# Altium PCB L298_Board.PcbDoc
Units mm, origin at the board's own origin, x right, y up, seen from the top; angles counter-clockwise.
Board outline 35.56 x 35.56 mm, 2 copper layers (Top Layer, Bottom Layer); 20 components, 15 nets, 72 pads, 39 vias.
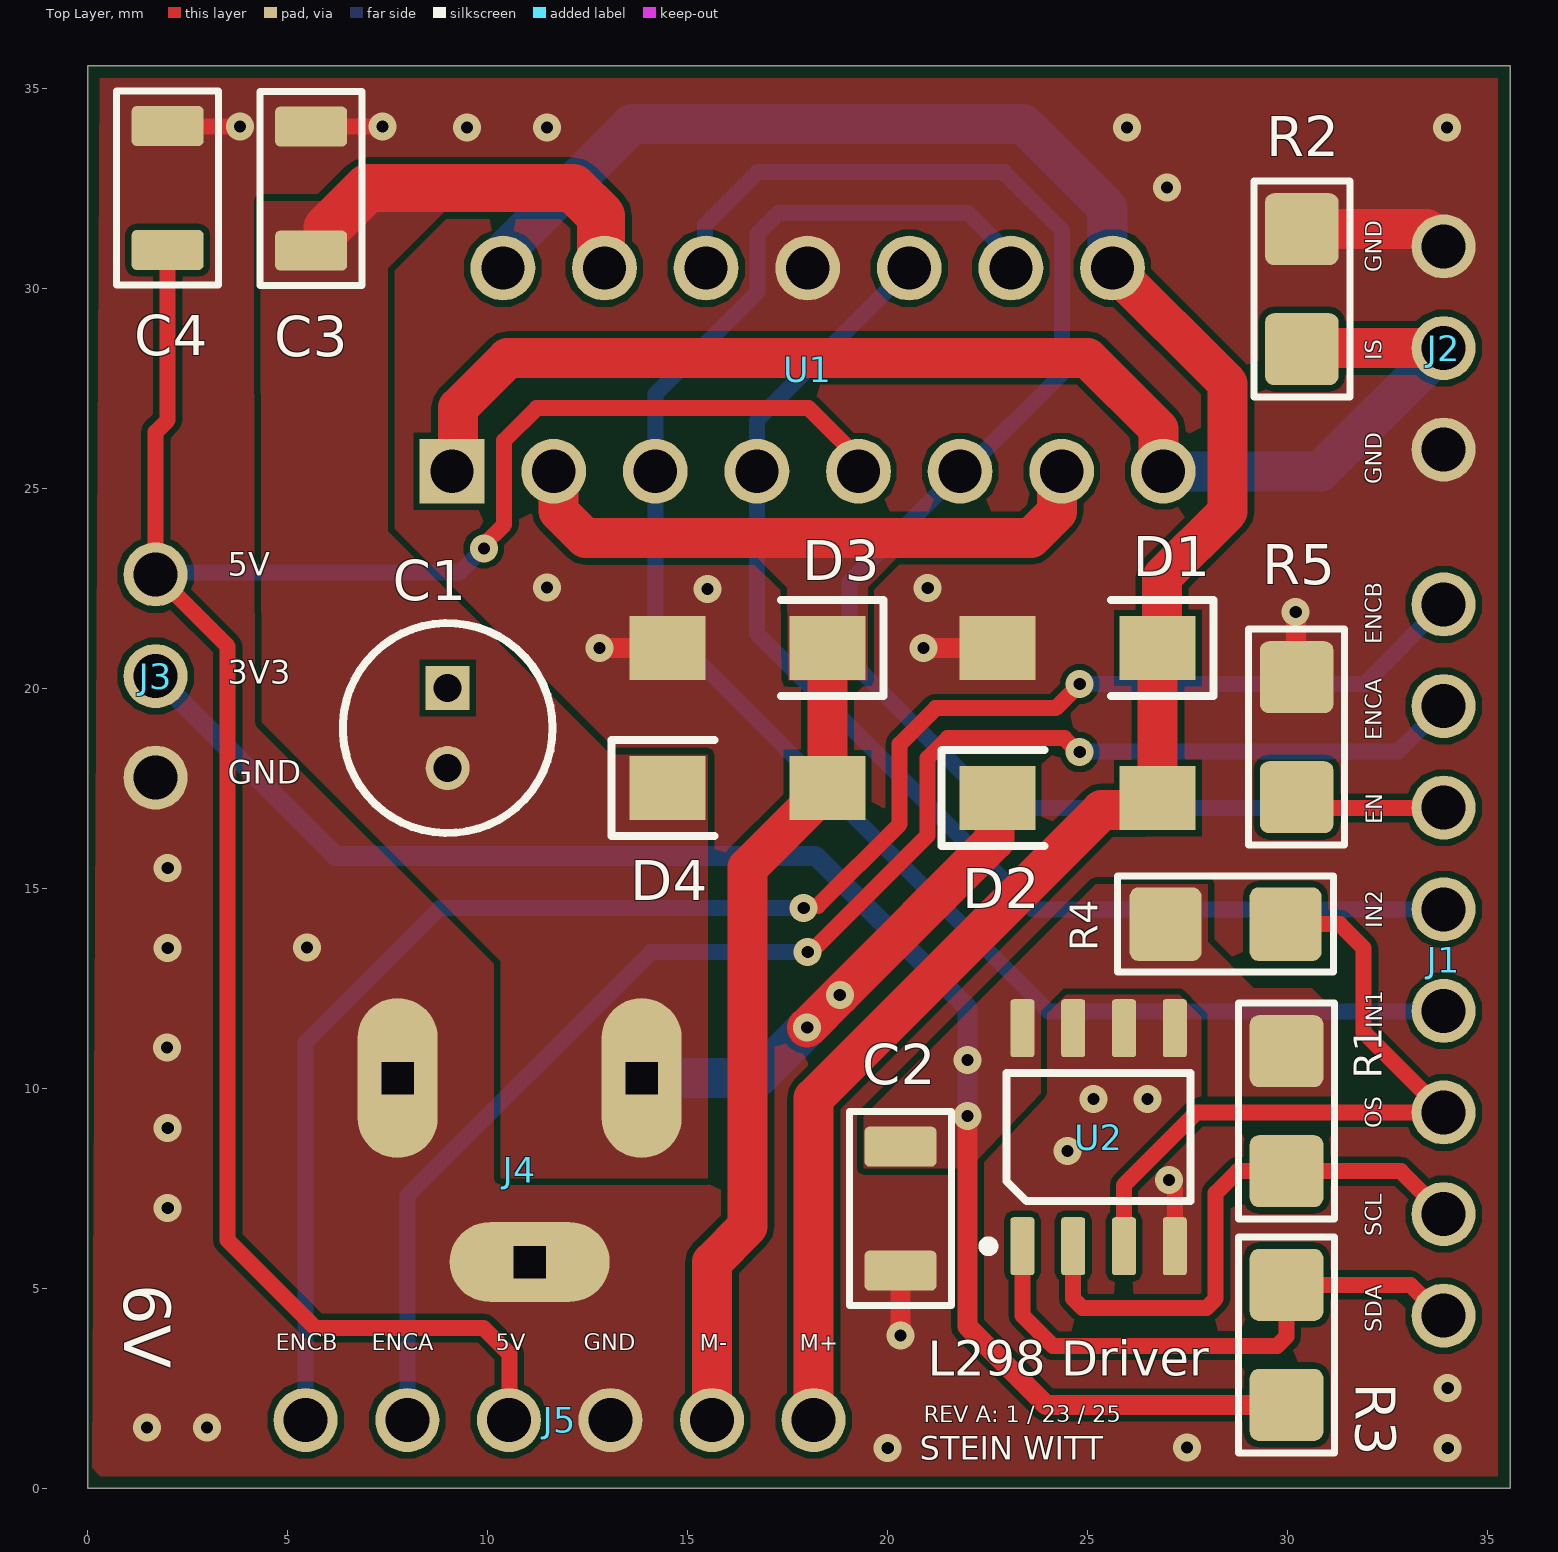
[diagram p0: Top Layer view]
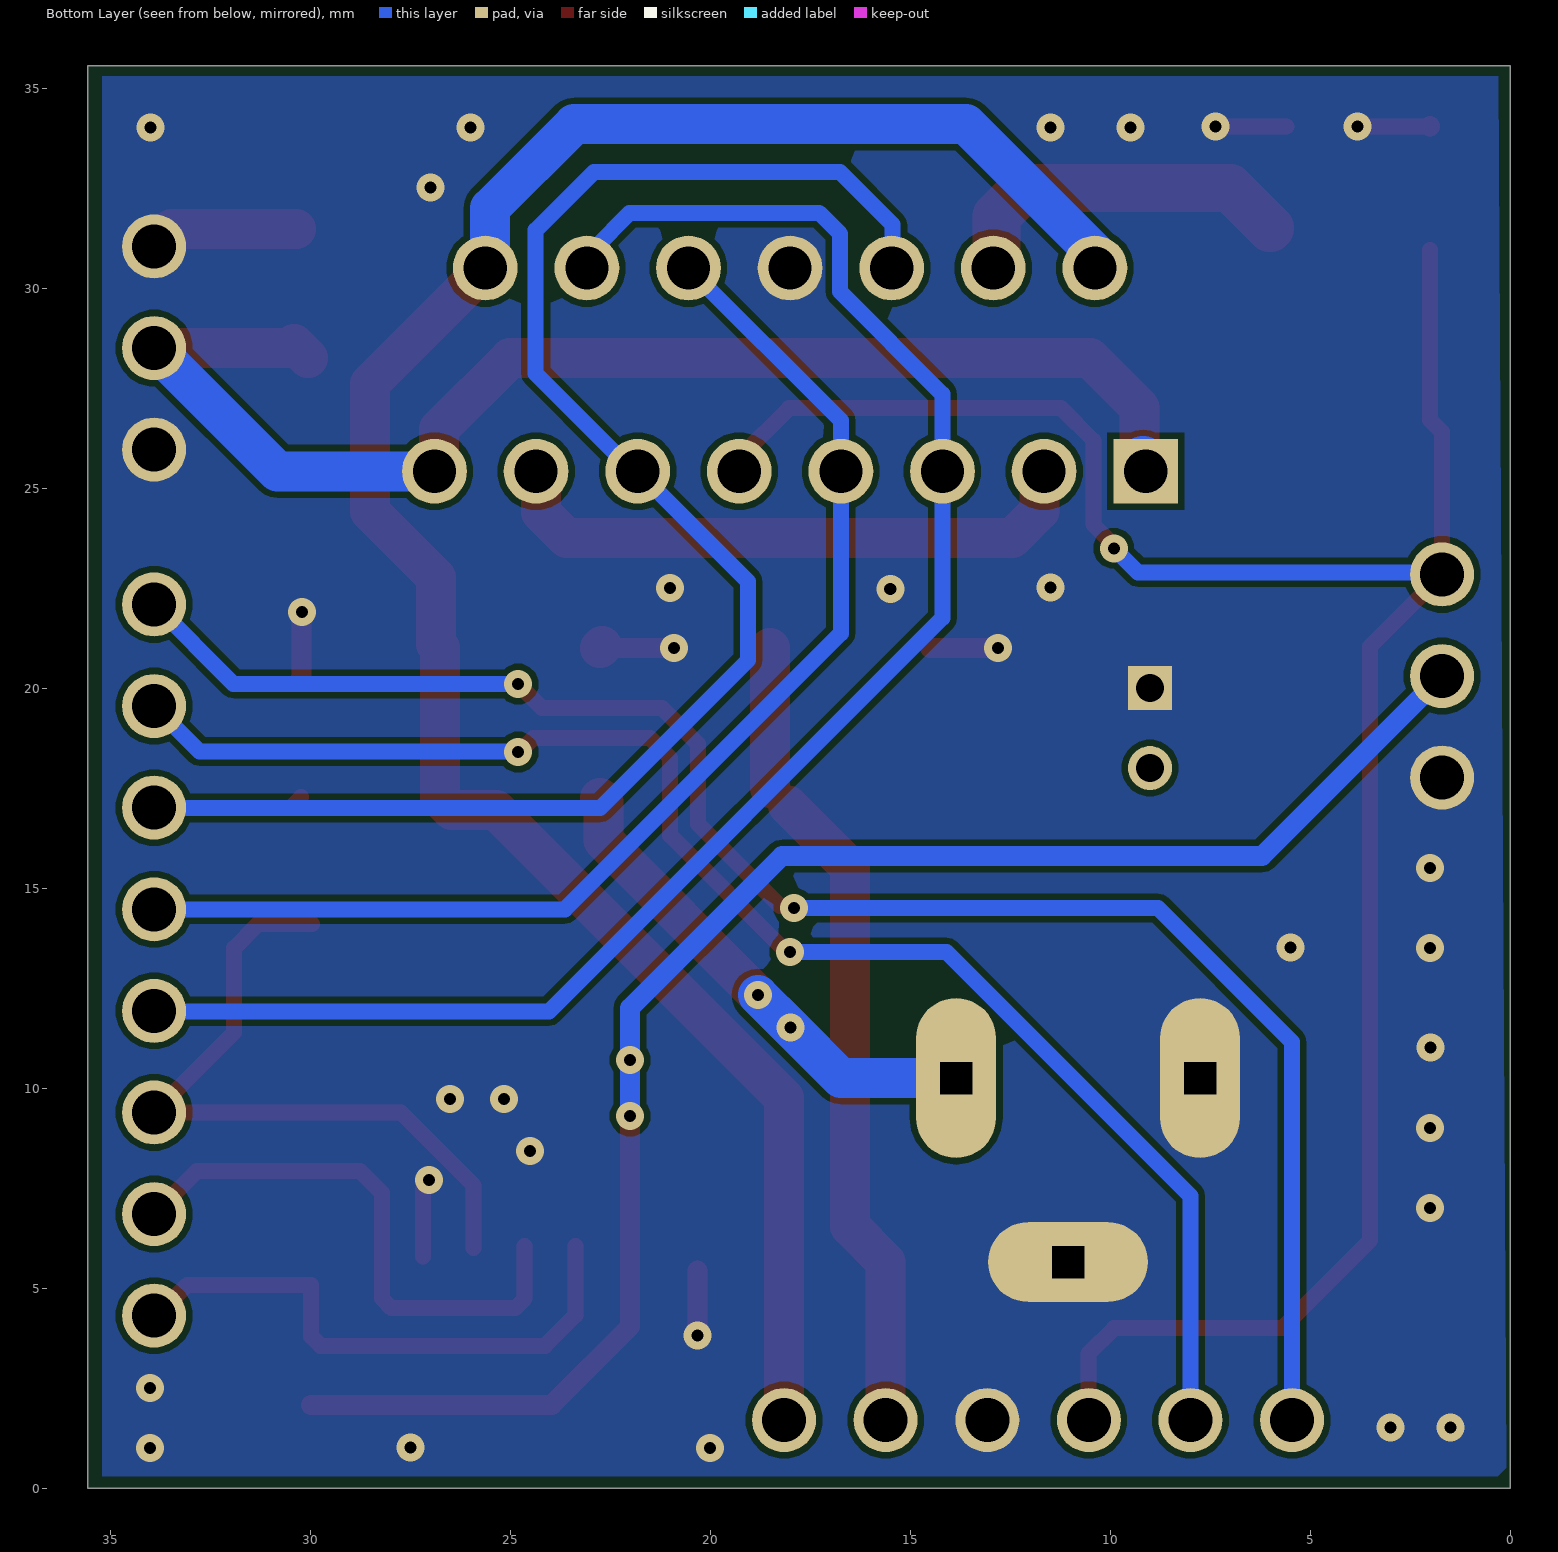
[diagram p1: Bottom Layer view, seen from below]
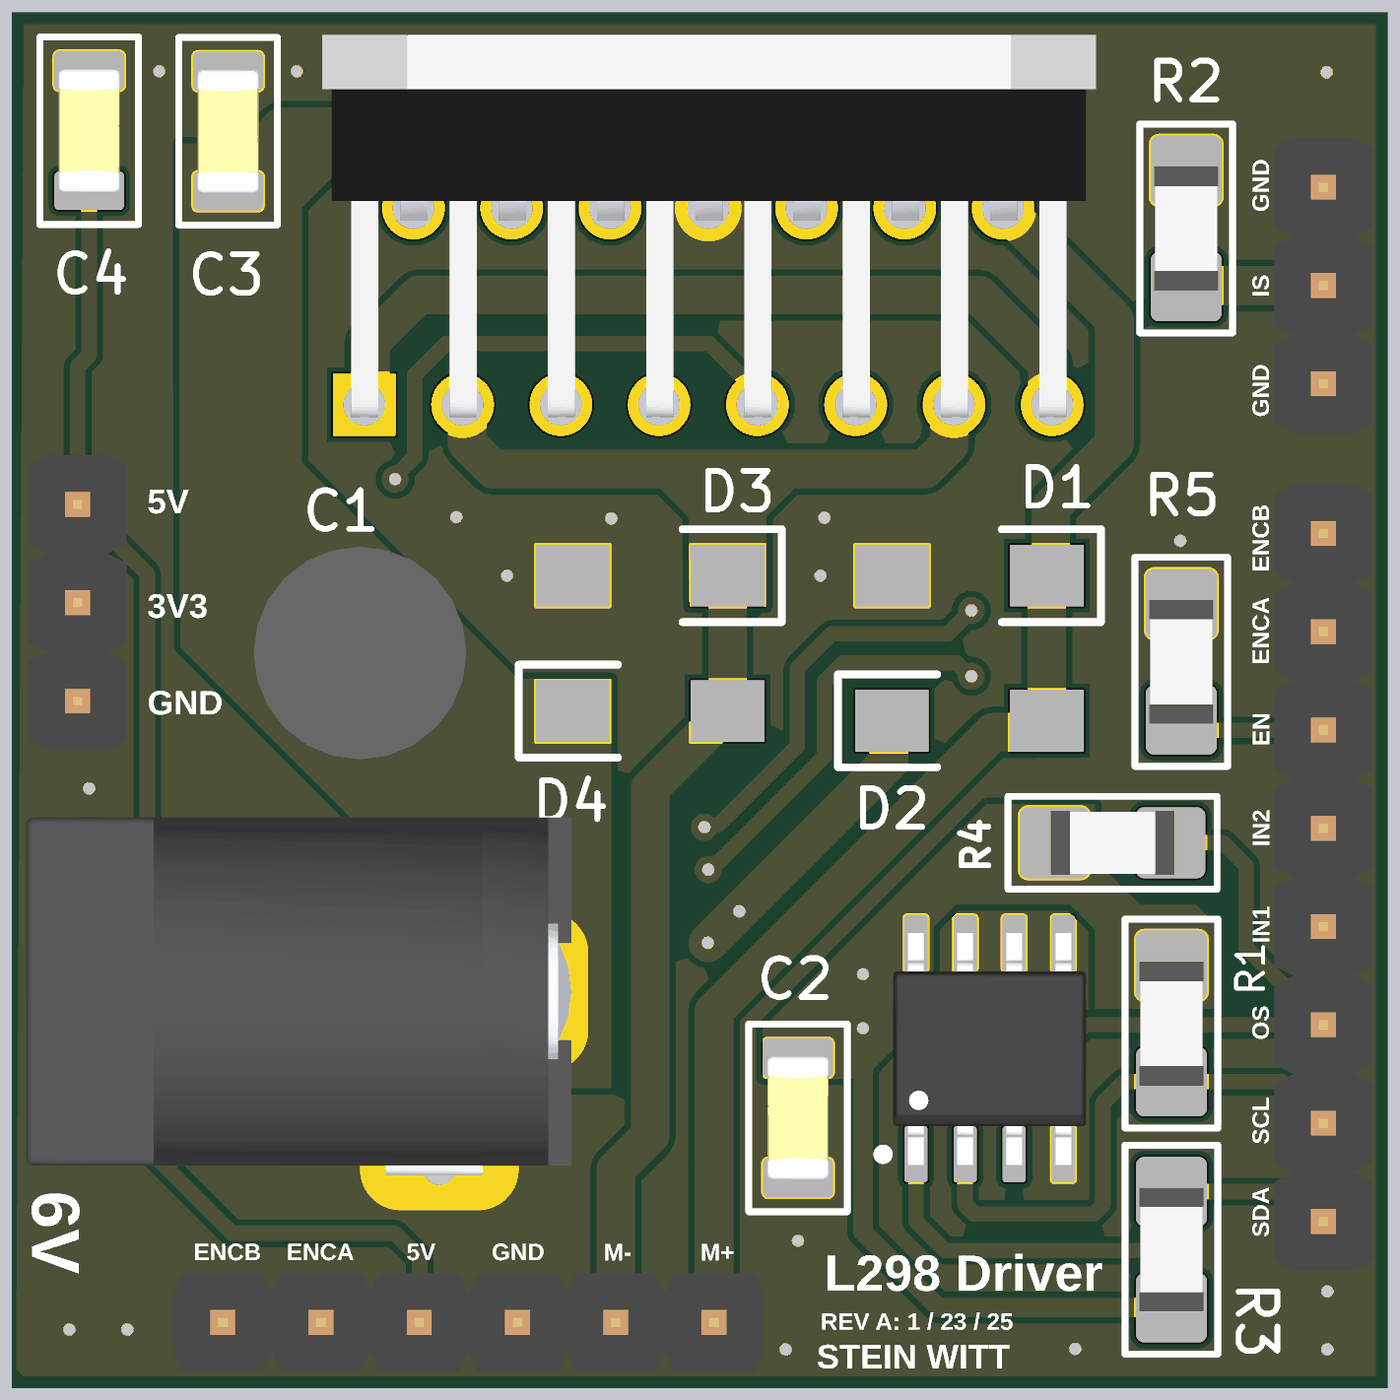
[diagram p2: 3D render of the assembled board from above, using the file's embedded part models]

## Layer stack, top to bottom
Top Solder: solder mask 0.0102, Solder Resist, Dk 3.5
Top Layer: signal copper 0.0356
Dielectric 1: dielectric 0.32, FR-4, Dk 4.8
Bottom Layer: signal copper 0.0356
Bottom Solder: solder mask 0.0102, Solder Resist, Dk 3.5

## Board outline
0,0 35.56,0 35.56,35.56 0,35.56

## Design rules (kind name [scope] priority, off if disabled: settings)
Clearance [All] p1: gap=0.152 ignorepadtopadclearanceinfootprint=FALSE
HoleSize [All] p1: absolutevalues=TRUE maxlimit=4 minlimit=0.025 maxpercent=80.000 minpercent=20.000
MinimumAnnularRing [All] p1: minimumring=0.127
PlaneClearance [All] p1: clearance=0.5
PolygonConnect [All] p1: connectstyle=Direct reliefconductorwidth=0.254 reliefentries=4 polygonreliefangle="90 Angle" airgapwidth=0.254
RoutingVias [All] p1: holewidth=0.305 width=0.61 viastyle="Through Hole" minholewidth=0.254 minwidth=0.508 maxholewidth=1.27 maxwidth=2.54
SilkToSolderMaskClearance [IsPad] p1: minsilkscreentomaskgap=0.041 clearancetoexposedcopper=TRUE
SolderMaskExpansion [All] p1: expansion=0.051 istentingtop=FALSE
SupplyNets "Schematic Supply Nets_3" [InNet('3V3')] p1: voltage=0.000
SupplyNets "Schematic Supply Nets_2" [InNet('GND')] p2: voltage=0.000
SupplyNets "Schematic Supply Nets_1" [InNet('5V')] p3: voltage=0.000
SupplyNets "Schematic Supply Nets" [InNet('6V')] p4: voltage=0.000
Width [All] p1: maxlimit=2 minlimit=0.152 preferedwidth=0.254 minimp=50.000000 maximp=50.000000 favimp=50.000000
27 further rules are at their usual default settings.

## Components (designator, comment, footprint, x,y, rotation, side; value= is the part's Value field where it differs from the comment)
C1 "REA010M2CBK-0511P" CAP_TH_RADIAL_0511 9,20 r270 top value=1uF
C2 "C1206C104K5RAC7800" CAP_1206 20.32,6.985 r90 top
C3 "C1206C104K5RAC7800" CAP_1206 5.588,32.486 r270 top
C4 "C1206C104K5RAC7800" CAP_1206 2,32.5 r90 top
D1 "RS2AA R3G" RS2AA 24.75,21 r180 top
D2 "RS2AA R3G" RS2AA 24.75,17.25 r0 top
D3 "RS2AA R3G" RS2AA 16.5,21 r180 top
D4 "RS2AA R3G" RS2AA 16.5,17.5 r0 top
J1 "8 Pin Male Connector" "8 PIN THT HEADER" 33.9,13.2 r270 top
J2 "3 Pin 2.54mm Male Connector" "3 PIN THT HEADER" 33.9,28.5 r270 top
J3 "3 Pin 2.54mm Male Connector" "3 PIN THT HEADER" 1.7,20.3 r90 top
J4 "Barrel Jack" GRAVITECH_CON-SOCJ-2155 7.75,10.25 r0 top
J5 "Motor_Header" "6 PIN THT HEADER" 11.8,1.7 r180 top
R1 "RC1206JR-0710KL" RES_1206 29.972,9.422 r270 top value=10k
R2 "RL1206FR-070R04L" RES_1206 30.353,29.972 r270 top value=40M
R3 "RC1206JR-0710KL" RES_1206 29.972,3.58 r90 top value=10k
R4 "RC1206JR-0710KL" RES_1206 28.448,14.097 r180 top value=10k
R5 "RC1206JR-0710KL" RES_1206 30.226,18.772 r270 top value=10k
U1 "L298N" L298N 9.11,25.42 r90 top
U2 "LM75AIMXNOPB" SOIC8 25.273,8.77 r90 top

## Footprints (in the part's own frame and the unit in brackets; to place one, negate y for a bottom-side part, rotate by r counter-clockwise, add the part's x,y. Pads: shape width x height; smd on the part's side, far side on the other; paste and mask are expansions set on the pad)
"3 PIN THT HEADER" [mm] "Pin Header, pitch 2.54 mm, THT, Vertical, single row, 3p"
  round 1.6 hole 1.1: 1(-2.54,0) 2(0,0) 3(2.54,0)
  body extent -3.81,-1.27 3.81,1.27, height 8.57
"6 PIN THT HEADER" [mm] "Pin Header, pitch 2.54 mm, THT, Vertical, single row, 6p"
  round 1.6 hole 1.1: 1(-6.35,0) 2(-3.81,0) 3(-1.27,0) 4(1.27,0) 5(3.81,0) 6(6.35,0)
  body extent -7.62,-1.27 7.62,1.27, height 8.57
"8 PIN THT HEADER" [mm] "Pin Header, pitch 2.54 mm, THT, Vertical, single row, 8p"
  round 1.6 hole 1.1: 1(-8.89,0) 2(-6.35,0) 3(-1.27,0) 4(1.27,0) 5(-3.81,0) 6(3.81,0) 7(8.89,0) 8(6.35,0)
  body extent -10.16,-1.27 10.16,1.27, height 8.57
CAP_1206 [mm]
  rrect25% 1x1.8 smd: 1(-1.55,0) 2(1.55,0)
  silkscreen extent -2.42,-1.28 2.42,1.28, body extent -1.6,-0.8 1.6,0.8, height 0.94
CAP_TH_RADIAL_0511 [mm]
  rect 1.1x1.1 / inner round 1.1 / far side rect 1.1x1.1 hole 0.7: 1(0,0)
  round 1.1 hole 0.7: 2(2,0)
  silkscreen extent -1.62,-2.62 3.62,2.63, body extent -1.74,-2.75 3.75,2.75, height 12.5
GRAVITECH_CON-SOCJ-2155 [mm]
  oval 2x4 hole 0.8 square: 1(6.1,0) 3(0,0)
  oval 4x2 hole 0.8 square: 2(3.3,-4.6)
  body extent -7.38,-4.75 6.72,4.5, height 11.1
L298N [mm]
  rect 1.62x1.62 hole 1.08: 1(0,0)
  round 1.62 hole 1.08: 2(5.08,-1.27) 3(0,-2.54) 4(5.08,-3.81) 5(0,-5.08) 6(5.08,-6.35) 7(0,-7.62) 8(5.08,-8.89) 9(0,-10.16) 10(5.08,-11.43) 11(0,-12.7) 12(5.08,-13.97) 13(0,-15.24) 14(5.08,-16.51) 15(0,-17.78)
  body extent -0.33,-18.91 9.56,1.09, height 20.45
RES_1206 [mm]
  rrect25% 1.8x1.84 smd: 1(-1.5,0) 2(1.5,0)
  silkscreen extent -2.7,-1.2 2.7,1.2, body extent -1.6,-0.83 1.6,0.83, height 0.57
RS2AA [mm]
  rect 1.9x1.6 smd: 1(-2,0) 2(2,0)
  silkscreen extent -3.4,-1.2 -0.83,1.2, body extent -2.3,-1 2.3,1, height 2.5
SOIC8 [mm] "SOIC, 8-Leads, Body 4.91x3.90mm, Pitch 1.27mm, IPC Medium Density"
  rrect25% 1.45x0.6 smd: 1(-2.725,1.905) 2(-2.725,0.635) 3(-2.725,-0.635) 4(-2.725,-1.905) 5(2.725,-1.905) 6(2.725,-0.635) 7(2.725,0.635) 8(2.725,1.905)
  silkscreen extent -2.85,-2.3 1.6,2.88, body extent -3,-2.5 3,2.5, height 1.75

## Part data
C1: "Radial Leaded 160V 1.0uF 20% 5x11mm", Capacitor Type=Aluminium, Manufacturer=Lelon, Max Operating Temperature=85°C, Min Operating Temperature=-40°C, Package Style=RadialMeter, Rated DC Voltage (URdc)=160V, Ripple Current=20mA, Supplier Part Number=140-REA1R0M2CBK0511P, Tolerance  (fill in as +-)=20%, Category="Aluminum Electrolytic Capacitors", ComponentLink1Description=https://datasheet.ciiva.com:443/pdfs/VipMasterIC/IC/LELO/LELOS00009/LELOS00009-1.pdf?src-supplier=IHS+Markit, ComponentLink1URL=https://datasheet.ciiva.com:443/pdfs/VipMasterIC/IC/LELO/LELOS00009/LELOS00009-1.pdf?src-supplier=IHS+Markit, ComponentLink2Description=http://www.mouser.com/ds/2/231/lelon_REA[1]-341020.pdf?src-supplier=Mouser, ComponentLink2URL=http://www.mouser.com/ds/2/231/lelon_REA[1]-341020.pdf?src-supplier=Mouser, Diameter=5mm, Dielectric Material=Aluminium, Length=11mm, Manufacturer Part Number=REA010M2CBK-0511P, Packaging=Bulk, Pins=2, Polarity=Polarized, Pricing="1=0.1, 10=0.057, 50=0.057, 100=0.054, 500=0.047, 1000=0.041, 2000=0.034, 5000=0.028, 10000=0.023, 25000=0.02 (USD)", Reach SVHC Compliant=Yes, RoHS=Yes, RoHS Compliant=Yes, Series=REA, Stock=18847, Supplier=Mouser, Terminal Pitch=2mm, Tolerance (fill in as +-)=20%
C2 C3 C4: "0.1 µF ±10% 50V Ceramic Capacitor X7R 1206 (3216 Metric)", Capacitance=100nF
D1 D2 D3 D4: "Diode Fast Recovery Rectifier 50V 1.5A 2-Pin DO-214AC Plastic T/R", Manufacturer="Taiwan Semiconductor", Supplier Part Number=RS2AAR3GCT-ND, ComponentLink1Description=https://www.taiwansemi.com/products/datasheet/RS2AA%20SERIES_G14.pdf?src-supplier=Digikey, ComponentLink1URL=https://www.taiwansemi.com/products/datasheet/RS2AA%20SERIES_G14.pdf?src-supplier=Digikey, Manufacturer Part Number="RS2AA R3G", Pricing="1=0.55, 10=0.365, 100=0.2482, 500=0.1944 (USD)", RoHS=Yes, RoHS Compliant=Yes, Stock=3391, Supplier=Digikey
J5: library part "6 pin 2.54mm Male Connector"
R1 R3 R4 R5: "Res Thick Film 1206 10K Ohm 5% 1/4W", Case Code (Imperial)=1206, Case Code (Metric)=3216, Manufacturer=Yageo, Max Operating Temperature=155°C, Max Power Dissipation=250mW, Min Operating Temperature=-55°C, Package Quantity=1, Resistance Tolerance=5%, Resistor Type="Thick Film", Supplier Part Number=4750733, Temperature Coefficient=100ppm/°C, Voltage Rating=200V, Case/Package=1206, Category="Chip SMD Resistors", ComponentLink1Description=https://datasheet.ciiva.com/29154/402664-da-01-en-smd-widerstand-chip1206-10-kohm-29154546.pdf?src-supplier=Conrad, ComponentLink1URL=https://datasheet.ciiva.com/29154/402664-da-01-en-smd-widerstand-chip1206-10-kohm-29154546.pdf?src-supplier=Conrad, ComponentLink2Description=https://datasheet.ciiva.com/2458/pyu-rc1206-51-rohs-l-4-2458635.pdf?src-supplier=Digikey, ComponentLink2URL=https://datasheet.ciiva.com/2458/pyu-rc1206-51-rohs-l-4-2458635.pdf?src-supplier=Digikey, ComponentLink3Description=https://datasheet.ciiva.com/2458/pyu-rc1206-51-rohs-l-4-2458636.pdf?src-supplier=Digikey, ComponentLink3URL=https://datasheet.ciiva.com/2458/pyu-rc1206-51-rohs-l-4-2458636.pdf?src-supplier=Digikey, ComponentLink4Description=https://datasheet.ciiva.com/2458/pyu-rc1206-51-rohs-l-4-2458637.pdf?src-supplier=Digikey, ComponentLink4URL=https://datasheet.ciiva.com/2458/pyu-rc1206-51-rohs-l-4-2458637.pdf?src-supplier=Digikey, ComponentLink5Description=https://datasheet.ciiva.com/7983/444357-7983813.pdf?src-supplier=Element14, ComponentLink5URL=https://datasheet.ciiva.com/7983/444357-7983813.pdf?src-supplier=Element14, Height=0.026inch, Lead Free="Lead Free", Length=0.122inch, Manufacturer Part Number=RC1206JR-0710KL, Number of Terminations=2, Packaging="Cut Tape", Power Rating=250mW, Pricing="5000=0.0032, 20000=0.003, 75000=0.0029, 150000=0.0028, 375000=0.0027 (USD)", Reach SVHC Compliant=Unknown, RoHS=Yes, RoHS Compliant=Yes, Series=RC1206, Stock=4695000, Supplier="Future Electronics", Termination=SMD/SMT, Tolerance=5%, Width=0.063inch
R2: "SMD Current Sense Resistor, 40 Milliohms, ± 1%, 250 mW, 1206 [3216 Metric], Thick Film", Case Code (Imperial)=1206, Case Code (Metric)=3216, Manufacturer=Yageo, Max Operating Temperature=155°C, Max Power Dissipation=250mW, Min Operating Temperature=-55°C, Package Quantity=5000, Ratings=AEC-Q200, Resistor Type="Thick Film", Supplier Part Number=311-.04LWCT-ND, Temperature Coefficient=1200ppm/°C, Tolerance=1%, Case/Package=1206, Category="Chip SMD Resistors", ComponentLink1Description=https://datasheet.ciiva.com/15328/pyu-rl-521-rohs-l-5-15328860.pdf?src-supplier=Mouser, ComponentLink1URL=https://datasheet.ciiva.com/15328/pyu-rl-521-rohs-l-5-15328860.pdf?src-supplier=Mouser, Features="Moisture Resistant,Automotive AEC-Q200", Height=0.55mm, Lead Free="Lead Free", Length=3.1mm, Manufacturer Part Number=RL1206FR-070R04L, Number of Terminations=2, Packaging="Tape and Reel", Power Rating=250mW, Pricing="1=0.52, 10=0.166, 50=0.1484, 100=0.1306, 1000=0.12757 (USD)", RoHS=Yes, RoHS Compliant=Yes, Series=RL, Stock=18033, Supplier=Digikey, Technology="THICK FILM", Termination=SMD/SMT, Weight=0.000571oz, Width=1.6mm
U1: "Dual Full Bridge Motor Driver 15-Pin(15+Tab) MULTIWATT V Tube", Package=None, Availability=Unavailable, MP=L298N, Price=None
U2: "No Description Available", Mfr_Name="Texas Instruments", RefDes=RefDes, Type=Type

## Via types
v1: diameter 0.7, hole 0.305, Top Layer to Bottom Layer, tented both sides, 27 vias
v2: diameter 0.7, hole 0.3, Top Layer to Bottom Layer, tented both sides, 12 vias

## Nets (pads, with @x,y where several pads share a name; then routed paths per layer and width w, separated by ;. In a path a pad name is that pad's centre, name@x,y a point inside that pad or via, vN(x,y) a via of type N, cw(c..) or ccw(c..) an arc to the next point about the centre after c; other vN are vias at no path point)
3V3: C2.2 J3.2 R1.1 R3.1 R4.2 U2.8 | length 40.5
  Top Layer w0.5: v2(22,9.3) 22,4.035 23.955,2.08 R3.1
  Bottom Layer w0.5: J3.2 6.2,15.8 18.2,15.8 22,12 v2(22,10.7) v2(22,9.3)
5V: C4.1 J3.3 J5.4 U1.9 | length 56.5
  Top Layer w0.4: C4.1 2,26.7 1.7,26.4 J3.3 3.5,21.04 3.5,6.2 5.7,4 9.9,4 10.541,3.359 J5.4@10.541,1.7 ; v2(9.906,23.495) 9.906,23.576 10.414,24.084 10.414,26.189 11.225,27 18.025,27 19.27,25.755 U1.9
  Bottom Layer w0.4: J3.3@2.105,22.895 9.306,22.895 v2(9.906,23.495)
6V: C1.2 C3.2 D2.1 D4.1 J4.1 U1.4 | length 22.4
  Top Layer w1: v1(17.988,11.511) v1(18.803,12.326) 22.669,16.192 22.669,17.17 D2.1
  Top Layer w1.2: 6,31.5 7,32.5 12.137,32.5 12.84,31.797 12.84,30.58 U1.4
  Bottom Layer w1: J4.1 16.727,10.25 v1(17.988,11.511) v1(18.803,12.326)
ENABLE: J1.5 R5.2 U1.6 U1.11 | length 43.9
  Top Layer w0.4: R5.2 30.498,17 J1.5@33.9,17
  Bottom Layer w0.4: U1.6 15.434,30.526 15.434,31.584 16.75,32.9 22.904,32.9 24.359,31.445 24.359,27.859 21.92,25.42 U1.11 19.05,22.66 19.05,20.701 22.751,17 J1.5@33.5,17
ENC_A: J1.2 J5.5 | length 38
  Top Layer w0.4: v1(18,13.4) 18.08,13.4 21,16.32 21,18.251 21.499,18.75 24.416,18.75 24.766,18.4 v1(24.8,18.4)
  Bottom Layer w0.4: J5.5 7.99,7.303 14.087,13.4 v1(18,13.4) ; v1(24.8,18.4) 24.815,18.415 32.765,18.415 J1.2
ENC_B: J1.1 J5.6 | length 43.6
  Top Layer w0.4: v1(17.9,14.5) 17.957,14.557 18.257,14.557 20.3,16.6 20.3,18.6 21.2,19.5 24.2,19.5 v1(24.8,20.1)
  Bottom Layer w0.4: J5.6 5.45,11.15 8.8,14.5 v1(17.9,14.5) ; v1(24.8,20.1) 31.91,20.1 J1.1
GND: C1.1 C2.1 C3.1 C4.2 D1.2 D3.2 J2.1 J2.3 J3.1 J4.2 J4.3 J5.3 R2.1 R5.1 U1.8 U2.4 U2.5 U2.6 U2.7 | length 16
  Top Layer w0.4: C4.2@2.007,34.043 v2@3.803,34.043 ; C3.1 v2(7.366,34.036) ; v2(27.029,7.696) 27.029,7.615 27.178,7.466 U2.4@27.178,5.791
  Top Layer w0.5: C4.2 C4.2@2.007,34.043 ; v2@3.803,34.043 v2(3.81,34.036) ; v2(12.8,21) D3.2 ; v2(20.32,3.81) C2.1 ; v2(20.9,21) 22.65,21 D1.2@22.7,21.05 ; v1(30.2,21.9) 30.213,21.887 30.213,20.285 R5.1
  Top Layer w1: D1.2@22.7,21.05 D1.2 ; R2.1 33.468,31.472 33.623,31.317 J2.1@33.623,31.04
  other v1: 20,1 27.487,1.013 34,1 1.487,1.513 2.987,1.513 34,2.5 2,7 2,9 1.987,11.013 2,13.5 5.487,13.513 2,15.5 15.494,22.479 21,22.5 11.487,22.513 26.987,32.513 9.487,34.013 11.487,34.013 25.987,34.013 33.987,34.013
  other v2: 24.5,8.425 25.15,9.725 26.5,9.725
I_SENSE: J2.2 R2.2 U1.1 U1.15 | length 34.1
  Top Layer w1: U1.1 9.261,25.571 9.261,27.011 10.5,28.25 25,28.25 26.771,26.479 26.771,25.539 U1.15 ; R2.2@30.05,28.25 R2.2@30.4,28.6 ; R2.2@30.4,28.5 J2.2
  Bottom Layer w1: U1.15 30.82,25.42 J2.2
  Bottom Layer w1.2: U1.1 9.11,25.635 U1.1@9.175,25.7
INPUT1: J1.4 U1.5 U1.12 | length 41.7
  Bottom Layer w0.4: U1.12 22.9,30.68 22.9,30.986 22.009,31.877 17.272,31.877 16.75,31.355 16.75,29.91 14.19,27.35 U1.5 14.19,21.751 24.021,11.92 J1.4@33.9,11.92
INPUT2: J1.3 U1.7 U1.10 | length 30.7
  Bottom Layer w0.4: U1.10 16.73,26.69 U1.7 16.73,21.37 23.63,14.47 J1.3
MTR_BLK: D3.1 D4.2 J5.2 U1.3 U1.13 | length 35
  Top Layer w1: U1.3 11.769,25.301 11.769,24.426 12.446,23.749 23.583,23.749 24.231,24.398 24.231,25.301 U1.13 ; J5.2 15.61,5.65 16.5,6.54 16.5,15.511 D4.2@18.05,17.061 ; D4.2 D3.1
MTR_RED: D1.1 D2.2 J5.1 U1.2 U1.14 | length 54.2
  Top Layer w1: J5.1 18.15,9.75 25.35,16.95 26.45,16.95 D2.2 D1.1 26.854,21.104 26.854,22.765 28.5,24.411 28.5,27.62 U1.14
  Bottom Layer w1: U1.2 10.38,30.88 13.6,34.1 23.4,34.1 25.501,31.999 25.501,30.619 U1.14
OS: J1.6 R4.1 U2.3 | length 17.5
  Top Layer w0.4: U2.3@25.908,6 U2.3 25.908,7.569 27.729,9.39 J1.6 31.9,11.39 31.9,13.5 31.303,14.097 R4.1
SCL: J1.8 R1.2 U2.2 | length 14.1
  Top Layer w0.4: U2.2 24.638,4.734 24.872,4.5 27.966,4.5 28.2,4.734 28.2,7.372 28.75,7.922 R1.2 32.828,7.922 J1.8
SDA: J1.7 R3.2 U2.1 | length 14.3
  Top Layer w0.4: U2.1 23.368,4.318 24.13,3.556 29.738,3.556 29.972,3.79 R3.2 33.066,5.08 33.836,4.31 J1.7

## Polygon pours and split planes (outlines as drawn)
GND on Top Layer "GND_L01_P008" (solid, remove dead copper, pour order 8): 0.308,35.25 35.25,35.25 35.25,0.3 0.107,0.3
3V3 on Top Layer "3V3_L01_P004" (solid, pour order 4): 22.043,8 23.825,9.871 23.825,11.925 24.4,12.5 27.353,12.5 28,11.853 28,9.8 31.14,9.8 31.14,11.96 30.6,12.5 29.156,12.5 28,13.656 28,15.1 25.2,15.1 19.4,9.3 19.4,8
6V on Top Layer "6V_L01_P000" (solid, pour order 0): 13.081,18.338 7.5,23.919 7.5,30.5 9,32 9,32.25 7.575,32.25 7.5,32.175 4.325,32.175 4.325,30.075 4.349,19.151 10.325,13.175 10.325,7.75 15.5,7.75 15.5,18.338
GND on Top Layer "GND_L01_P005" (solid, pour order 5): 24.3,12.225 27.5,12.225 27.5,9.7 25.5,7.7 23.3,7.7 23.3,8.5 24.3,9.5
MTR_BLK on Top Layer "MTR_BLK_L01_P003" (solid, pour order 3): 17.514,20.2 19.5,20.2 19.5,22.525 20.43,23.455 20.43,24.2 16.525,24.2 16.525,23.475 17.487,22.513
GND on Bottom Layer "GND_L02_P006" (solid, remove dead copper, pour order 6): 0.299,35.3 35.2,35.3 35.2,0.3 0.099,0.3

## Silkscreen, mask and mechanical layers (free items; w line width, h text height)
Top Overlay:
  text "GND" at 32.492,30.4 h0.7 r90
  text "IS" at 32.492,28.2 h0.7 r90
  text "GND" at 32.492,25.1 h0.7 r90
  text "5V" at 3.5,22.612 h1
  text "ENCB" at 32.492,21.1 h0.7 r90
  text "3V3" at 3.5,19.912 h1
  text "ENCA" at 32.492,18.7 h0.7 r90
  text "GND" at 3.5,17.412 h1
  text "EN" at 32.5,16.6 h0.7 r90
  text "IN2" at 32.5,14 h0.7 r90
  text "IN1" at 32.5,11.5 h0.7 r90
  text "OS" at 32.492,9 h0.7 r90
  text "SCL" at 32.492,6.3 h0.7 r90
  text "6V" at 0.524,5.1 h2 r270
  text "SDA" at 32.492,3.9 h0.7 r90
  text "ENCB" at 4.7,3.308 h0.7
  text "ENCA" at 7.1,3.308 h0.7
  text "5V" at 10.2,3.308 h0.7
  text "GND" at 12.4,3.308 h0.7
  text "M-" at 15.3,3.3 h0.7
  text "M+" at 17.8,3.3 h0.7
  text "L298 Driver" at 21,2.518 h1.5
  text "REV A: 1 / 23 / 25" at 20.9,1.508 h0.7
  text "STEIN WITT" at 20.8,0.512 h1
Mechanical 5:
  the board outline again, w0.013